# Altium PCB 3_Battery_Charger_PCB.PcbDoc
Units mil, origin at the board's own origin, x right, y up, seen from the top; angles counter-clockwise.
Board outline 2655 x 3850 mil, 2 copper layers (Top Layer, Bottom Layer); 31 components, 22 nets, 122 pads, 11 vias.
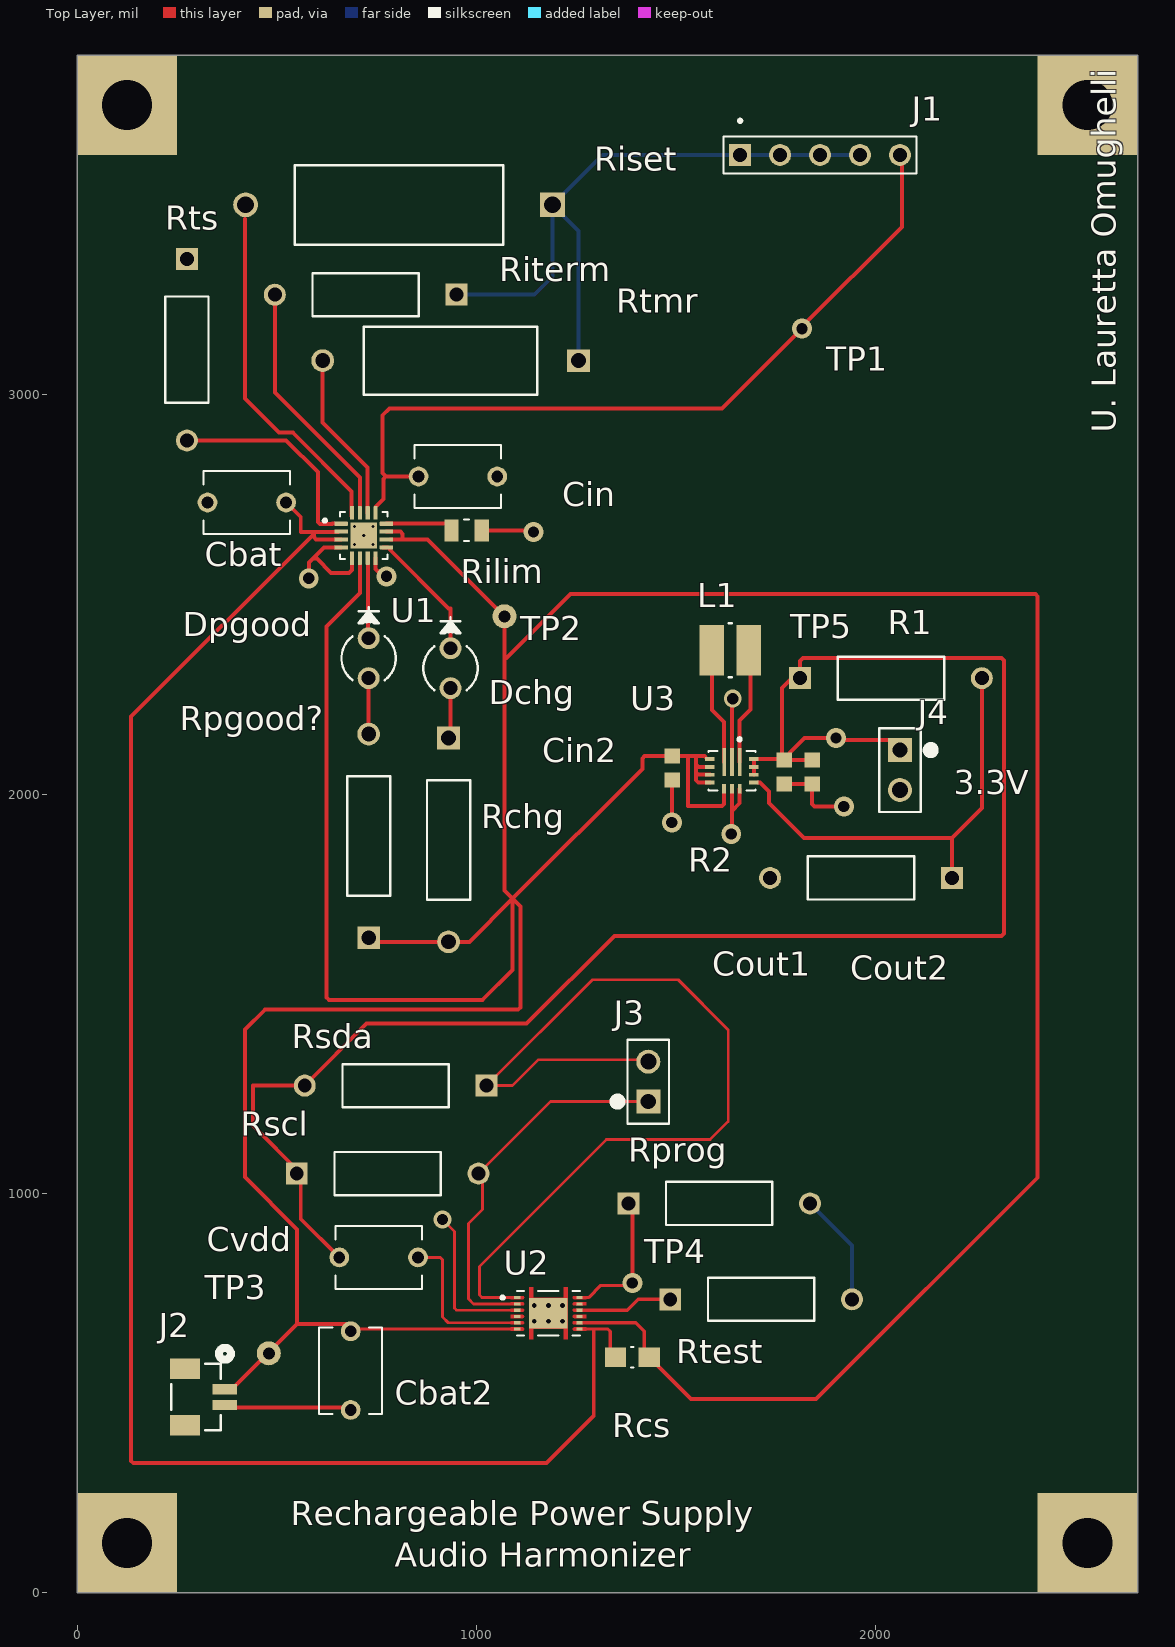
[diagram p0: Top Layer view]
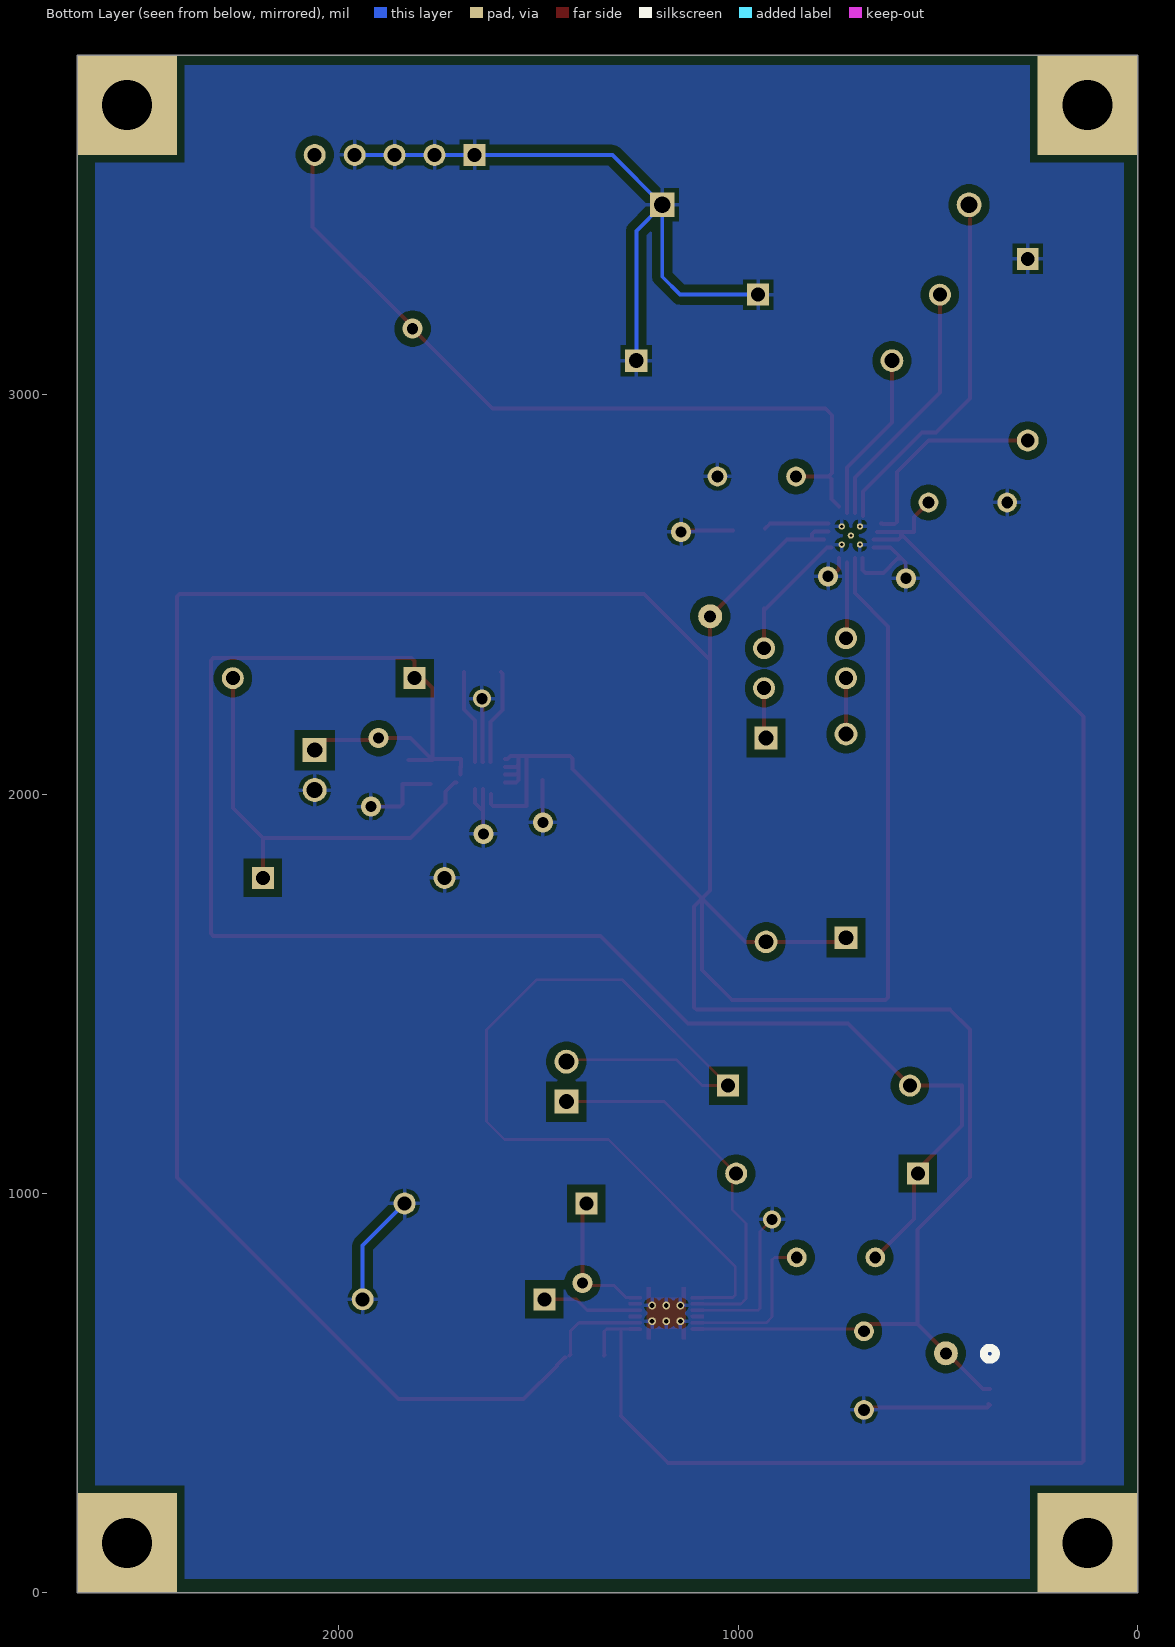
[diagram p1: Bottom Layer view, seen from below]
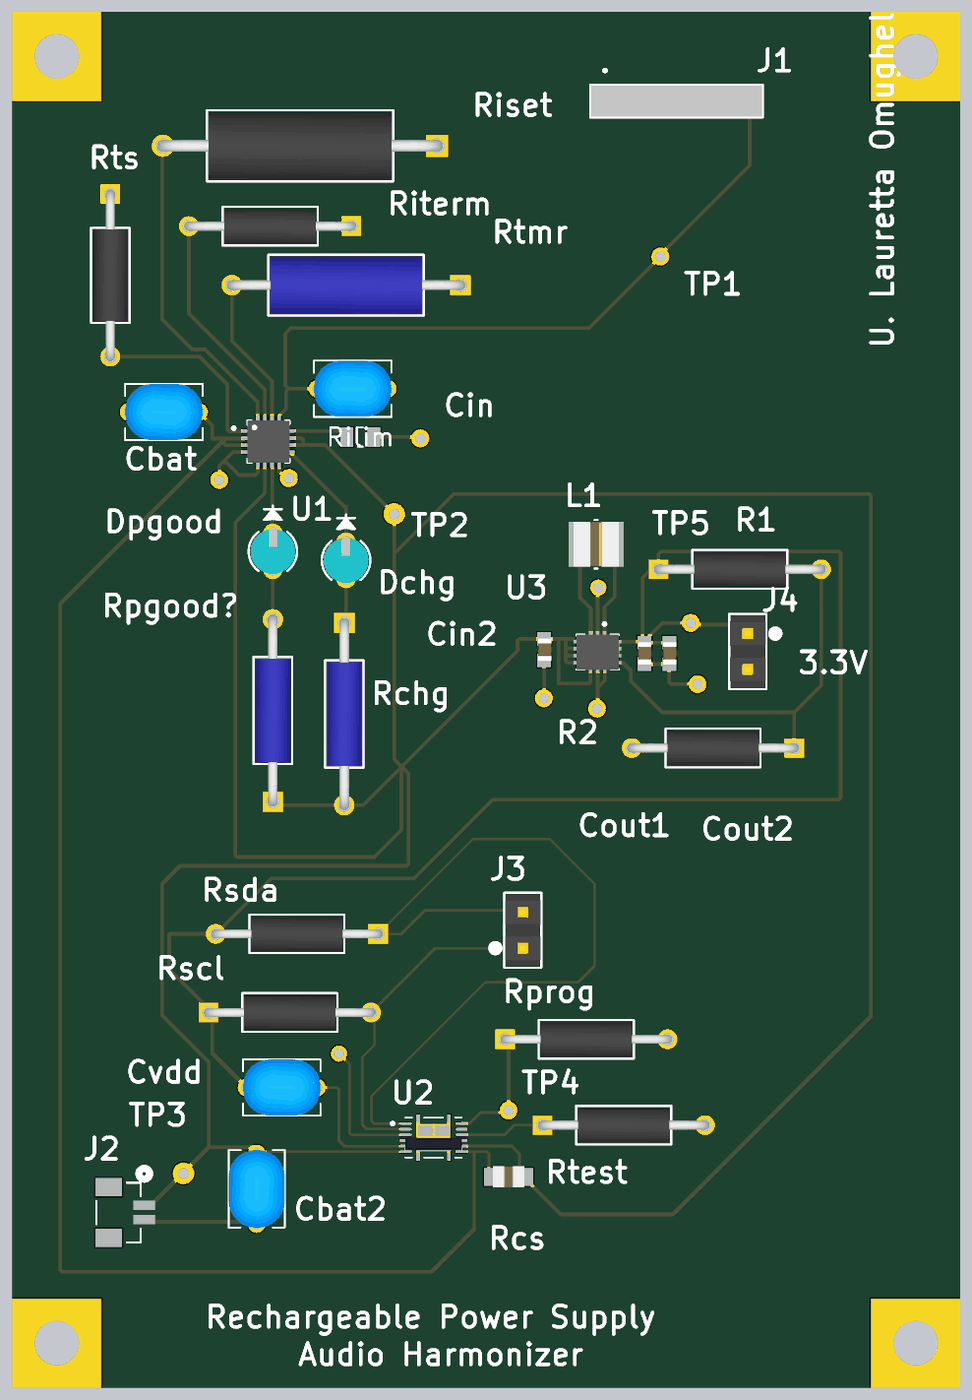
[diagram p2: 3D render of the assembled board from above, using the file's embedded part models]

## Layer stack, top to bottom
Top Solder: solder mask 0.4, Solder Resist, Dk 3.5
Top Layer: signal copper 1.4
Dielectric 1: dielectric 12.6, FR-4, Dk 4.8
Bottom Layer: signal copper 1.4
Bottom Solder: solder mask 0.4, Solder Resist, Dk 3.5

## Board outline
0,0 0,3850 2655,3850 2655,0

## Design rules (kind name [scope] priority, off if disabled: settings)
Clearance Clearance_POLY [InNamedPolygon('GND')] p1: gap=20 ignorepadtopadclearanceinfootprint=FALSE
Clearance [All] p2: gap=5 ignorepadtopadclearanceinfootprint=FALSE
HoleSize [All] p1: absolutevalues=TRUE maxlimit=150 minlimit=1 maxpercent=80.000 minpercent=20.000
PolygonConnect [All] p1: connectstyle=Relief reliefconductorwidth=10 reliefentries=4 polygonreliefangle="90 Angle" airgapwidth=10
RoutingVias [All] p1: holewidth=28 width=50 viastyle="Through Hole" minholewidth=28 minwidth=50 maxholewidth=28 maxwidth=50
SolderMaskExpansion [All] p1: expansion=4 istentingtop=FALSE
Width [InNet('NetCin_2')] p1 off: maxlimit=20 minlimit=10 preferedwidth=15 minimp=50.000000 maximp=50.000000 favimp=50.000000
29 further rules are at their usual default settings.

## Components (designator, comment, footprint, x,y, rotation, side; value= is the part's Value field where it differs from the comment)
Cbat "4.7 uF" CAP_RCER71H475K3K1H03B 425,2730 r180 top
Cbat2 "1 uF" CAP_RCER71H475K3K1H03B 685,556.57 r270 top
Cin "4.7 uF" CAP_RCER71H475K3K1H03B 953.43,2795 r180 top
Cin2 "Cap" CAPC1608X95N 1490,2065 r270 top value=10uF
Cout1 "Cap" CAPC1608X95N 1770,2055 r270 top value=10uF
Cout2 "Cap" CAPC1608X95N 1840,2055 r270 top value="47 uF"
Cvdd "0.47 uF" CAP_RCER71H475K3K1H03B 755,840 r180 top
Dchg "WP710A10-VN42" LED_WP710A10_KNB 935,2365 r270 top
Dpgood "WP710A10-VN42" LED_WP710A10_KNB 730,2390 r270 top
J1 "87224-5" TE_87224-5 1860,3600 r0 top
J2 "BM02B-SRSS-TB (LF)(SN)" CONN_BM02B-SRSS-TB_JST 297.96,490.32 r270 top
J3 "77311-101-02LF" 77311-101-02LF_AMP 1430,1230 r270 top
J4 "77311-101-02LF" 77311-101-02LF_AMP 2060,2110 r90 top
L1 "1 uH" IND_340068_WRE 1635,2360 r180 top
R1 "Rchg" RES_VISHAY_HVR25_VIS 1810,2290 r0 top value="560 kR"
R2 "Rchg" RES_VISHAY_HVR25_VIS 2190,1790 r180 top value="180 kR"
Rchg "Rchg" RES_CMF07_VIS 930,2140 r270 top value=490R
Rcs "RJ2J3" RES_ERJ6CWFR010V 1390,590 r180 top value="0.010 R"
Rilim "3.06 kR" RESC2012X60N 975,2660 r0 top
Riset "Riset" AC03_VIS 1190,3475 r180 top value="4.35 kR"
Riterm "Riterm" RES_VISHAY_HVR25_VIS 950,3250 r180 top value="3.57 kR"
Rpgood? "Rpgood" RES_CMF07_VIS 730,1640 r90 top value=490R
Rprog "Rprog" RES_VISHAY_HVR25_VIS 1380,975 r0 top value="1.0M R"
Rscl "Rchg" RES_VISHAY_HVR25_VIS 550,1050 r0 top value="5.1 kR"
Rsda "Rchg" RES_VISHAY_HVR25_VIS 1025,1270 r180 top value="5.1 kR"
Rtest "Rtest" RES_VISHAY_HVR25_VIS 1485,735 r0 top value="1.0M R"
Rtmr "Riset" RES_CMF60_VIS 1255,3085 r180 top value="56.2 kR"
Rts "Rchg" RES_VISHAY_HVR25_VIS 275,3340 r270 top value="10 kR"
U1 "BQ24232HRGTR" QFN50P300X300X100-17N 717.83,2647.17 r0 top
U2 "BQ27411DRZT-G1C" IC_BQ27441DRZR-G1A 1180,700 r0 top
U3 "TPS630250RNCT" VREG_TPS630250RNCT 1639.29,2058.19 r270 top

## Footprints (in the part's own frame and the unit in brackets; to place one, negate y for a bottom-side part, rotate by r counter-clockwise, add the part's x,y. Pads: shape width x height; smd on the part's side, far side on the other; paste and mask are expansions set on the pad)
77311-101-02LF_AMP [mil]
  rect 60x60 hole 38 mask+0: 1(0,0)
  round 60 hole 40 mask+0: 2(-100,0)
  silkscreen extent -155,-87 55,52, body extent -150,-50 50,50, height 350
AC03_VIS [mil]
  rect 62x62 hole 42 mask+0: 1(0,0)
  round 62 hole 42 mask+0: 2(768,0)
  silkscreen extent 123,-99 645,100, body extent -16,-94 784,95, height 189
CAP_RCER71H475K3K1H03B [mm]
  round 1.258 hole 0.75: 1(-2.5,0) 2(2.5,0)
  silkscreen extent -2.75,-2 2.75,2, body extent -2.75,-2 2.75,2, height 7.5
CAPC1608X95N [mm]
  rect 0.95x0.98 smd: 1(-0.763,0) 2(0.763,0)
  body extent -0.8,-0.44 0.8,0.51, height 0.4
CONN_BM02B-SRSS-TB_JST [mil]
  rect 26x61 smd paste+0 mask+0: 1(-19.68,72.04) 2(19.68,72.04)
  rect 51x75 smd: 3(-70.87,-27.37) 4(70.87,-27.37)
  silkscreen extent -123,-62 84,87, body extent 0,0 10,10, height 10
IC_BQ27441DRZR-G1A [mm]
  rect 0.4x0.2 smd paste-1 mask+0: 1(-1.975,1) 2(-1.975,0.6) 3(-1.975,0.2) 4(-1.975,-0.2) 5(-1.975,-0.6) 6(-1.975,-1) 7(1.975,-1) 8(1.975,-0.6) 9(1.975,-0.2) 10(1.975,0.2) 11(1.975,0.6) 12(1.975,1)
  rect 2.45x1.95 smd paste-2 mask+0: 13(0,0)
  round 0.5 hole 0.3: 14(-0.9,0.5) 15(0,0.5) 16(0.9,0.5) 17(-0.9,-0.5) 18(0,-0.5) 19(0.9,-0.5)
  Top Layer region: 2.4,0.9 1.65,0.9 1.645,0.9 1.64,0.901 1.634,0.901 1.629,0.902 1.624,0.903 1.619,0.905 1.614,0.907 1.609,0.909 1.605,0.911 1.6,0.913 1.596,0.916 1.591,0.919 1.587,0.922 1.583,0.926 1.579,0.929 1.576,0.933 1.572,0.937 1.569,0.941 1.566,0.946 1.563,0.95 1.561,0.955 1.559,0.959 1.557,0.964 1.555,0.969 1.553,0.974 1.552,0.979 1.551,0.984 1.551,0.99 1.55,0.995 1.55,1 1.55,1.005 1.551,1.01 1.551,1.016 1.552,1.021 1.553,1.026 1.555,1.031 1.557,1.036 1.559,1.041 1.561,1.045 1.563,1.05 1.566,1.054 1.569,1.059 1.572,1.063 1.576,1.067 1.579,1.071 1.583,1.074 1.587,1.078 1.591,1.081 1.596,1.084 1.6,1.087 1.605,1.089 1.609,1.091 1.614,1.093 1.619,1.095 1.624,1.097 1.629,1.098 1.634,1.099 1.64,1.099 1.645,1.1 1.65,1.1 2.4,1.1
  Top Layer region: 2.4,0.5 1.65,0.5 1.645,0.5 1.64,0.501 1.634,0.501 1.629,0.502 1.624,0.503 1.619,0.505 1.614,0.507 1.609,0.509 1.605,0.511 1.6,0.513 1.596,0.516 1.591,0.519 1.587,0.522 1.583,0.526 1.579,0.529 1.576,0.533 1.572,0.537 1.569,0.541 1.566,0.546 1.563,0.55 1.561,0.555 1.559,0.559 1.557,0.564 1.555,0.569 1.553,0.574 1.552,0.579 1.551,0.584 1.551,0.59 1.55,0.595 1.55,0.6 1.55,0.605 1.551,0.61 1.551,0.616 1.552,0.621 1.553,0.626 1.555,0.631 1.557,0.636 1.559,0.641 1.561,0.645 1.563,0.65 1.566,0.654 1.569,0.659 1.572,0.663 1.576,0.667 1.579,0.671 1.583,0.674 1.587,0.678 1.591,0.681 1.596,0.684 1.6,0.687 1.605,0.689 1.609,0.691 1.614,0.693 1.619,0.695 1.624,0.697 1.629,0.698 1.634,0.699 1.64,0.699 1.645,0.7 1.65,0.7 2.4,0.7
  Top Layer region: 2.4,0.1 1.65,0.1 1.645,0.1 1.64,0.101 1.634,0.101 1.629,0.102 1.624,0.103 1.619,0.105 1.614,0.107 1.609,0.109 1.605,0.111 1.6,0.113 1.596,0.116 1.591,0.119 1.587,0.122 1.583,0.126 1.579,0.129 1.576,0.133 1.572,0.137 1.569,0.141 1.566,0.146 1.563,0.15 1.561,0.155 1.559,0.159 1.557,0.164 1.555,0.169 1.553,0.174 1.552,0.179 1.551,0.184 1.551,0.19 1.55,0.195 1.55,0.2 1.55,0.205 1.551,0.21 1.551,0.216 1.552,0.221 1.553,0.226 1.555,0.231 1.557,0.236 1.559,0.241 1.561,0.245 1.563,0.25 1.566,0.254 1.569,0.259 1.572,0.263 1.576,0.267 1.579,0.271 1.583,0.274 1.587,0.278 1.591,0.281 1.596,0.284 1.6,0.287 1.605,0.289 1.609,0.291 1.614,0.293 1.619,0.295 1.624,0.297 1.629,0.298 1.634,0.299 1.64,0.299 1.645,0.3 1.65,0.3 2.4,0.3
  Top Layer region: 2.4,-0.3 1.65,-0.3 1.645,-0.3 1.64,-0.299 1.634,-0.299 1.629,-0.298 1.624,-0.297 1.619,-0.295 1.614,-0.293 1.609,-0.291 1.605,-0.289 1.6,-0.287 1.596,-0.284 1.591,-0.281 1.587,-0.278 1.583,-0.274 1.579,-0.271 1.576,-0.267 1.572,-0.263 1.569,-0.259 1.566,-0.254 1.563,-0.25 1.561,-0.245 1.559,-0.241 1.557,-0.236 1.555,-0.231 1.553,-0.226 1.552,-0.221 1.551,-0.216 1.551,-0.21 1.55,-0.205 1.55,-0.2 1.55,-0.195 1.551,-0.19 1.551,-0.184 1.552,-0.179 1.553,-0.174 1.555,-0.169 1.557,-0.164 1.559,-0.159 1.561,-0.155 1.563,-0.15 1.566,-0.146 1.569,-0.141 1.572,-0.137 1.576,-0.133 1.579,-0.129 1.583,-0.126 1.587,-0.122 1.591,-0.119 1.596,-0.116 1.6,-0.113 1.605,-0.111 1.609,-0.109 1.614,-0.107 1.619,-0.105 1.624,-0.103 1.629,-0.102 1.634,-0.101 1.64,-0.101 1.645,-0.1 1.65,-0.1 2.4,-0.1
  Top Layer region: 2.4,-0.7 1.65,-0.7 1.645,-0.7 1.64,-0.699 1.634,-0.699 1.629,-0.698 1.624,-0.697 1.619,-0.695 1.614,-0.693 1.609,-0.691 1.605,-0.689 1.6,-0.687 1.596,-0.684 1.591,-0.681 1.587,-0.678 1.583,-0.674 1.579,-0.671 1.576,-0.667 1.572,-0.663 1.569,-0.659 1.566,-0.654 1.563,-0.65 1.561,-0.645 1.559,-0.641 1.557,-0.636 1.555,-0.631 1.553,-0.626 1.552,-0.621 1.551,-0.616 1.551,-0.61 1.55,-0.605 1.55,-0.6 1.55,-0.595 1.551,-0.59 1.551,-0.584 1.552,-0.579 1.553,-0.574 1.555,-0.569 1.557,-0.564 1.559,-0.559 1.561,-0.555 1.563,-0.55 1.566,-0.546 1.569,-0.541 1.572,-0.537 1.576,-0.533 1.579,-0.529 1.583,-0.526 1.587,-0.522 1.591,-0.519 1.596,-0.516 1.6,-0.513 1.605,-0.511 1.609,-0.509 1.614,-0.507 1.619,-0.505 1.624,-0.503 1.629,-0.502 1.634,-0.501 1.64,-0.501 1.645,-0.5 1.65,-0.5 2.4,-0.5
  Top Layer region: 2.4,-1.1 1.65,-1.1 1.645,-1.1 1.64,-1.099 1.634,-1.099 1.629,-1.098 1.624,-1.097 1.619,-1.095 1.614,-1.093 1.609,-1.091 1.605,-1.089 1.6,-1.087 1.596,-1.084 1.591,-1.081 1.587,-1.078 1.583,-1.074 1.579,-1.071 1.576,-1.067 1.572,-1.063 1.569,-1.059 1.566,-1.054 1.563,-1.05 1.561,-1.045 1.559,-1.041 1.557,-1.036 1.555,-1.031 1.553,-1.026 1.552,-1.021 1.551,-1.016 1.551,-1.01 1.55,-1.005 1.55,-1 1.55,-0.995 1.551,-0.99 1.551,-0.984 1.552,-0.979 1.553,-0.974 1.555,-0.969 1.557,-0.964 1.559,-0.959 1.561,-0.955 1.563,-0.95 1.566,-0.946 1.569,-0.941 1.572,-0.937 1.576,-0.933 1.579,-0.929 1.583,-0.926 1.587,-0.922 1.591,-0.919 1.596,-0.916 1.6,-0.913 1.605,-0.911 1.609,-0.909 1.614,-0.907 1.619,-0.905 1.624,-0.903 1.629,-0.902 1.634,-0.901 1.64,-0.901 1.645,-0.9 1.65,-0.9 2.4,-0.9
  Top Layer region: -1.645,-0.9 -1.64,-0.901 -1.634,-0.901 -1.629,-0.902 -1.624,-0.903 -1.619,-0.905 -1.614,-0.907 -1.609,-0.909 -1.605,-0.911 -1.6,-0.913 -1.596,-0.916 -1.591,-0.919 -1.587,-0.922 -1.583,-0.926 -1.579,-0.929 -1.576,-0.933 -1.572,-0.937 -1.569,-0.941 -1.566,-0.946 -1.563,-0.95 -1.561,-0.955 -1.559,-0.959 -1.557,-0.964 -1.555,-0.969 -1.553,-0.974 -1.552,-0.979 -1.551,-0.984 -1.551,-0.99 -1.55,-0.995 -1.55,-1 -1.55,-1.005 -1.551,-1.01 -1.551,-1.016 -1.552,-1.021 -1.553,-1.026 -1.555,-1.031 -1.557,-1.036 -1.559,-1.041 -1.561,-1.045 -1.563,-1.05 -1.566,-1.054 -1.569,-1.059 -1.572,-1.063 -1.576,-1.067 -1.579,-1.071 -1.583,-1.074 -1.587,-1.078 -1.591,-1.081 -1.596,-1.084 -1.6,-1.087 -1.605,-1.089 -1.609,-1.091 -1.614,-1.093 -1.619,-1.095 -1.624,-1.097 -1.629,-1.098 -1.634,-1.099 -1.64,-1.099 -1.645,-1.1 -1.65,-1.1 -2.4,-1.1 -2.4,-0.9 -1.65,-0.9
  Top Layer region: -1.645,-0.5 -1.64,-0.501 -1.634,-0.501 -1.629,-0.502 -1.624,-0.503 -1.619,-0.505 -1.614,-0.507 -1.609,-0.509 -1.605,-0.511 -1.6,-0.513 -1.596,-0.516 -1.591,-0.519 -1.587,-0.522 -1.583,-0.526 -1.579,-0.529 -1.576,-0.533 -1.572,-0.537 -1.569,-0.541 -1.566,-0.546 -1.563,-0.55 -1.561,-0.555 -1.559,-0.559 -1.557,-0.564 -1.555,-0.569 -1.553,-0.574 -1.552,-0.579 -1.551,-0.584 -1.551,-0.59 -1.55,-0.595 -1.55,-0.6 -1.55,-0.605 -1.551,-0.61 -1.551,-0.616 -1.552,-0.621 -1.553,-0.626 -1.555,-0.631 -1.557,-0.636 -1.559,-0.641 -1.561,-0.645 -1.563,-0.65 -1.566,-0.654 -1.569,-0.659 -1.572,-0.663 -1.576,-0.667 -1.579,-0.671 -1.583,-0.674 -1.587,-0.678 -1.591,-0.681 -1.596,-0.684 -1.6,-0.687 -1.605,-0.689 -1.609,-0.691 -1.614,-0.693 -1.619,-0.695 -1.624,-0.697 -1.629,-0.698 -1.634,-0.699 -1.64,-0.699 -1.645,-0.7 -1.65,-0.7 -2.4,-0.7 -2.4,-0.5 -1.65,-0.5
  Top Layer region: -1.645,-0.1 -1.64,-0.101 -1.634,-0.101 -1.629,-0.102 -1.624,-0.103 -1.619,-0.105 -1.614,-0.107 -1.609,-0.109 -1.605,-0.111 -1.6,-0.113 -1.596,-0.116 -1.591,-0.119 -1.587,-0.122 -1.583,-0.126 -1.579,-0.129 -1.576,-0.133 -1.572,-0.137 -1.569,-0.141 -1.566,-0.146 -1.563,-0.15 -1.561,-0.155 -1.559,-0.159 -1.557,-0.164 -1.555,-0.169 -1.553,-0.174 -1.552,-0.179 -1.551,-0.184 -1.551,-0.19 -1.55,-0.195 -1.55,-0.2 -1.55,-0.205 -1.551,-0.21 -1.551,-0.216 -1.552,-0.221 -1.553,-0.226 -1.555,-0.231 -1.557,-0.236 -1.559,-0.241 -1.561,-0.245 -1.563,-0.25 -1.566,-0.254 -1.569,-0.259 -1.572,-0.263 -1.576,-0.267 -1.579,-0.271 -1.583,-0.274 -1.587,-0.278 -1.591,-0.281 -1.596,-0.284 -1.6,-0.287 -1.605,-0.289 -1.609,-0.291 -1.614,-0.293 -1.619,-0.295 -1.624,-0.297 -1.629,-0.298 -1.634,-0.299 -1.64,-0.299 -1.645,-0.3 -1.65,-0.3 -2.4,-0.3 -2.4,-0.1 -1.65,-0.1
  Top Layer region: -1.645,0.3 -1.64,0.299 -1.634,0.299 -1.629,0.298 -1.624,0.297 -1.619,0.295 -1.614,0.293 -1.609,0.291 -1.605,0.289 -1.6,0.287 -1.596,0.284 -1.591,0.281 -1.587,0.278 -1.583,0.274 -1.579,0.271 -1.576,0.267 -1.572,0.263 -1.569,0.259 -1.566,0.254 -1.563,0.25 -1.561,0.245 -1.559,0.241 -1.557,0.236 -1.555,0.231 -1.553,0.226 -1.552,0.221 -1.551,0.216 -1.551,0.21 -1.55,0.205 -1.55,0.2 -1.55,0.195 -1.551,0.19 -1.551,0.184 -1.552,0.179 -1.553,0.174 -1.555,0.169 -1.557,0.164 -1.559,0.159 -1.561,0.155 -1.563,0.15 -1.566,0.146 -1.569,0.141 -1.572,0.137 -1.576,0.133 -1.579,0.129 -1.583,0.126 -1.587,0.122 -1.591,0.119 -1.596,0.116 -1.6,0.113 -1.605,0.111 -1.609,0.109 -1.614,0.107 -1.619,0.105 -1.624,0.103 -1.629,0.102 -1.634,0.101 -1.64,0.101 -1.645,0.1 -1.65,0.1 -2.4,0.1 -2.4,0.3 -1.65,0.3
  Top Layer region: -1.645,0.7 -1.64,0.699 -1.634,0.699 -1.629,0.698 -1.624,0.697 -1.619,0.695 -1.614,0.693 -1.609,0.691 -1.605,0.689 -1.6,0.687 -1.596,0.684 -1.591,0.681 -1.587,0.678 -1.583,0.674 -1.579,0.671 -1.576,0.667 -1.572,0.663 -1.569,0.659 -1.566,0.654 -1.563,0.65 -1.561,0.645 -1.559,0.641 -1.557,0.636 -1.555,0.631 -1.553,0.626 -1.552,0.621 -1.551,0.616 -1.551,0.61 -1.55,0.605 -1.55,0.6 -1.55,0.595 -1.551,0.59 -1.551,0.584 -1.552,0.579 -1.553,0.574 -1.555,0.569 -1.557,0.564 -1.559,0.559 -1.561,0.555 -1.563,0.55 -1.566,0.546 -1.569,0.541 -1.572,0.537 -1.576,0.533 -1.579,0.529 -1.583,0.526 -1.587,0.522 -1.591,0.519 -1.596,0.516 -1.6,0.513 -1.605,0.511 -1.609,0.509 -1.614,0.507 -1.619,0.505 -1.624,0.503 -1.629,0.502 -1.634,0.501 -1.64,0.501 -1.645,0.5 -1.65,0.5 -2.4,0.5 -2.4,0.7 -1.65,0.7
  Top Layer region: -1.645,1.1 -1.64,1.099 -1.634,1.099 -1.629,1.098 -1.624,1.097 -1.619,1.095 -1.614,1.093 -1.609,1.091 -1.605,1.089 -1.6,1.087 -1.596,1.084 -1.591,1.081 -1.587,1.078 -1.583,1.074 -1.579,1.071 -1.576,1.067 -1.572,1.063 -1.569,1.059 -1.566,1.054 -1.563,1.05 -1.561,1.045 -1.559,1.041 -1.557,1.036 -1.555,1.031 -1.553,1.026 -1.552,1.021 -1.551,1.016 -1.551,1.01 -1.55,1.005 -1.55,1 -1.55,0.995 -1.551,0.99 -1.551,0.984 -1.552,0.979 -1.553,0.974 -1.555,0.969 -1.557,0.964 -1.559,0.959 -1.561,0.955 -1.563,0.95 -1.566,0.946 -1.569,0.941 -1.572,0.937 -1.576,0.933 -1.579,0.929 -1.583,0.926 -1.587,0.922 -1.591,0.919 -1.596,0.916 -1.6,0.913 -1.605,0.911 -1.609,0.909 -1.614,0.907 -1.619,0.905 -1.624,0.903 -1.629,0.902 -1.634,0.901 -1.64,0.901 -1.645,0.9 -1.65,0.9 -2.4,0.9 -2.4,1.1 -1.65,1.1
  Top Layer region: 1.225,-1.65 0.975,-1.65 0.975,-0.975 -0.975,-0.975 -0.975,-1.65 -1.225,-1.65 -1.225,1.65 -0.975,1.65 -0.975,0.975 0.975,0.975 0.975,1.65 1.225,1.65
  silkscreen extent -3.01,-1.42 2,1.42, body extent -2.05,-0.95 2.05,0, height 1.25
IND_340068_WRE [mil]
  rect 61x126 smd paste+0 mask+0: 1(-46.5,0) 2(46.5,0)
  silkscreen extent -4,-68 4,68, body extent -63,-63 63,63, height 47
LED_WP710A10_KNB [mil]
  round 55 hole 35 mask+0: 1(0,0) 2(100,0)
  silkscreen extent -78,-68 105,68, body extent -13,-63 113,63, height 182
QFN50P300X300X100-17N [mm]
  rrect25% 0.86x0.26 smd: 1(-1.435,0.75) 2(-1.435,0.25) 3(-1.435,-0.25) 4(-1.435,-0.75) 9(1.435,-0.75) 10(1.435,-0.25) 11(1.435,0.25) 12(1.435,0.75)
  rrect25% 0.26x0.86 smd: 5(-0.75,-1.435) 6(-0.25,-1.435) 7(0.25,-1.435) 8(0.75,-1.435) 13(0.75,1.435) 14(0.25,1.435) 15(-0.25,1.435) 16(-0.75,1.435)
  rect 1.68x1.68 smd paste-2: 17(0,0)
  round 0.4 hole 0.2 mask+0: 18(0,0) 19(-0.58,0.58) 20(0.58,0.58) 21(-0.58,-0.58) 22(0.58,-0.58)
  silkscreen extent -2.57,-1.5 1.5,1.5, body extent -1.5,-1.5 1.5,1.5, height 1
RES_CMF07_VIS [mil]
  rect 57x57 hole 37 mask+0: 1(0,0)
  round 57 hole 37 mask+0: 2(510,0)
  silkscreen extent 105,-54 405,54, body extent -14,-49 524,49, height 98
RES_CMF60_VIS [mil]
  rect 57x57 hole 37 mask+0: 1(0,0)
  round 57 hole 37 mask+0: 2(640,0)
  silkscreen extent 102,-85 538,85, body extent -14,-80 654,80, height 160
RES_ERJ6CWFR010V [mm]
  rect 1.35x1.25 smd: 1(-1.075,0) 2(1.075,0)
  silkscreen extent -0.08,-0.65 0.08,0.65, body extent -1.13,-0.75 1.13,0.75, height 0.76
RES_VISHAY_HVR25_VIS [mil]
  rect 55x55 hole 35 mask+0: 1(0,0)
  round 55 hole 35 mask+0: 2(455,0)
  silkscreen extent 94,-54 360,54, body extent -12,-49 467,49, height 98
RESC2012X60N [mm]
  rect 0.92x1.38 smd: 1(-0.955,0) 2(0.955,0)
  silkscreen extent -0.17,-0.68 0.17,0.68
TE_87224-5 [mil]
  rect 55x55 hole 35: 1(-200,0)
  round 55 hole 35: 2(-100,0) 3(0,0) 4(100,0) 5(200,0)
  silkscreen extent -242,-46 242,89, body extent -242,-46 242,46, height 318
VREG_TPS630250RNCT [mm]
  rect 1.79x0.22 smd paste-2 mask+0: 1(-0.555,0.49) 3(-0.555,-0.49)
  rect 1.79x0.24 smd paste-2 mask+0: 2(-0.555,0)
  rect 0.24x0.6 smd mask+0: 4(-0.75,-1.4) 5(-0.25,-1.4) 6(0.25,-1.4) 7(0.75,-1.4) 11(0.75,1.4) 12(0.25,1.4) 13(-0.25,1.4) 14(-0.75,1.4)
  rect 0.6x0.24 smd mask+0: 8(1.15,-0.5) 9(1.15,0) 10(1.15,0.5)
  silkscreen extent -2.1,-1.5 1.25,1.5, body extent -1.25,-1.5 1.25,1.5, height 0.95

## Part data
Cbat Cin: library part RCER71H475K3K1H03B, "Lead capacitor X7R(EIA) with Capacitance 4.7F, Rated Voltage 50Vdc", Package=NONSTANDARD, Check_prices=https://www.snapeda.com/parts/RCER71H475K3K1H03B/Murata/view-part/?ref=eda, Digi-Key_Part_Number=490-11893-ND, MF=Murata, MP=RCER71H475K3K1H03B, Purchase-URL=https://pricing.snapeda.com/search/part/RCER71H475K3K1H03B/?ref=eda, SnapEDA_Link=https://www.snapeda.com/parts/RCER71H475K3K1H03B/Murata/view-part/?ref=snap
Cbat2 Cvdd: library part RCER71H475K3K1H03B, "K105K20X7RF5TH5", Package=NONSTANDARD, Check_prices=https://www.snapeda.com/parts/RCER71H475K3K1H03B/Murata/view-part/?ref=eda, Digi-Key_Part_Number=490-11893-ND, MF=Murata, MP=RCER71H475K3K1H03B, Purchase-URL=https://pricing.snapeda.com/search/part/RCER71H475K3K1H03B/?ref=eda, SnapEDA_Link=https://www.snapeda.com/parts/RCER71H475K3K1H03B/Murata/view-part/?ref=snap
Cin2 Cout1 Cout2: "Capacitor", LatestRevisionDate=17-Jul-2002, LatestRevisionNote="Re-released for DXP Platform.", PackageDescription="Radial Cap, Thru-Hole; 2 Leads; 0.3 in Pin Spacing", PackageReference=RAD-0.3, Published=8-Jun-2000, Publisher="Altium Limited"
Dchg Dpgood: "No Description Available", Mfr_Name=Kingbright, Copyright="Copyright (C) 2022 Ultra Librarian. All rights reserved.", Manufacturer_Part_Number=WP710A10-VN42, RefDes=RefDes, Type=DEV
J1: "Conn Unshrouded Header HDR 5 POS 2.54mm Solder ST Thru-Hole", Package=None, Availability=Good, Centerline_Pitch="2.54 mm[.1 in]", Check_prices=https://www.snapeda.com/parts/87224-5/TE%20Connectivity%20AMP%20Connectors/view-part/1233389/?ref=eda, EU_RoHS_Compliance=Compliant, MF="TE Connectivity", MP=87224-5, Number_of_Positions=5, Price=None, Product_Type=Connector, Purchase-URL=https://pricing.snapeda.com/search/part/87224-5/?ref=eda, SnapEDA_Link=https://www.snapeda.com/parts/87224-5/TE%20Connectivity%20AMP%20Connectors/view-part/1233389/?ref=snap
J2: "No Description Available", Mfr_Name=JST, Copyright="Copyright (C) 2022 Ultra Librarian. All rights reserved.", Digi-Key_Part_Number_1=455-1788-2-ND, Digi-Key_Part_Number_2=455-1788-1-ND, Digi-Key_Part_Number_3=455-1788-6-ND, Manufacturer_Part_Number="BM02B-SRSS-TB (LF)(SN)", RefDes=RefDes, Type=DEV
J3 J4: "No Description Available", Mfr_Name="Amphenol ICC", Copyright="Copyright (C) 2022 Ultra Librarian. All rights reserved.", Digi-Key_Part_Number_1=609-5674-ND, Digi-Key_Part_Number_2=77311-101-02LF-ND, Manufacturer_Part_Number=77311-101-02LF, RefDes=RefDes, Type=DEV
L1: library part 744383340068, "744383340068", Mfr_Name="Wurth Electronics", Copyright="Copyright (C) 2022 Ultra Librarian. All rights reserved.", Digi-Key_Part_Number_1=732-4953-2-ND, Digi-Key_Part_Number_2=732-4953-1-ND, Digi-Key_Part_Number_3=732-4953-6-ND, Manufacturer_Part_Number=744383340068, RefDes=RefDes, Type=DEV
R1 R2 Rchg Rcs Riset Riterm Rpgood? Rprog Rscl Rsda Rtest Rtmr Rts: library part Res1, "Resistor", LatestRevisionDate=17-Jul-2002, LatestRevisionNote="Re-released for DXP Platform.", PackageDescription="Axial Device, Thru-Hole; 2 Leads; 0.3 in Pin Spacing", PackageReference=AXIAL-0.3, Published=8-Jun-2000, Publisher="Altium Limited"
Rilim: library part RT0805BRD073K05L, "RES SMD 3.05K OHM 0.1% 1/8W 0805 RT0805BRD073K05L", Package=None, Availability=Unavailable, MP=RT0805BRD073K05L, Price=None
U1 U2: "No Description Available", Mfr_Name="Texas Instruments", Copyright="Copyright (C) 2021 Ultra Librarian. All rights reserved.", RefDes=RefDes, Type=DEV
  U1: Digi-Key_Part_Number_1=296-39912-1-ND, Digi-Key_Part_Number_2=296-39912-2-ND, Digi-Key_Part_Number_3=296-39912-6-ND, Digi-Key_Part_Number_4=BQ24232HRGTR-ND, Manufacturer_Part_Number=BQ24232HRGTR
  U2: Digi-Key_Part_Number_1=296-37270-1-ND, Digi-Key_Part_Number_2=296-37270-2-ND, Digi-Key_Part_Number_3=296-37270-6-ND, Digi-Key_Part_Number_4=2156-BQ27411DRZT-G1C-ND, Manufacturer_Part_Number=BQ27411DRZT-G1C
U3: "Industrys Smallest 4A Switch Single-Inductor Buck-Boost Converter 14-VQFN-HR -40 to 85", Package="VQFN-HR-14 Texas Instruments", Availability=Warning, Check_prices=https://www.snapeda.com/parts/TPS630250RNCT/Texas%20Instruments/view-part/543444/?ref=eda, MF="Texas Instruments", MP=TPS630250RNCT, Price=None, Purchase-URL=https://pricing.snapeda.com/search/part/TPS630250RNCT/?ref=eda, SnapEDA_Link=https://www.snapeda.com/parts/TPS630250RNCT/Texas%20Instruments/view-part/543444/?ref=snap

## Free pads (board coordinates)
  round 60 hole 30: 5(480,600) 6(1070,2445)
  rect 250x250 hole 125: MH(125,125) MH(125,3725) MH(2530,125) MH(2530,3725)

## Via types
v1: diameter 50, hole 28, Top Layer to Bottom Layer, 9 vias
v2: diameter 45, hole 28, Top Layer to Bottom Layer, 2 vias

## Nets (pads, with @x,y where several pads share a name; then routed paths per layer and width w, separated by ;. In a path a pad name is that pad's centre, name@x,y a point inside that pad or via, vN(x,y) a via of type N, cw(c..) or ccw(c..) an arc to the next point about the centre after c; other vN are vias at no path point)
GND: Cbat2.2 Cbat.2 Cin2.2 Cin.1 Cout1.2 Cout2.2 J1.1 J1.2 J1.3 J1.4 J2.2 J4.2 R2.2 Rilim.2 Riset.1 Riterm.1 Rprog.2 Rtest.2 Rtmr.1 Rts.1 U1.4 U1.5 U1.8 U1.17 U1.18 U1.19 U1.20 U1.21 U1.22 U2.3 U2.13 U2.14 U2.15 U2.16 U2.17 U2.18 U2.19 U3.2 U3.9 U3.10 | length 3836.3
  Top Layer w7: v2(915,935) 945,905 945,712.87 950,707.87 U2.3
  Top Layer w10: J2.2@372.97,473.6 J2.2 376.24,464.39 678.76,464.39 Cbat2.2 ; v1@581.03,2540 581.03,2580 590.44,2589.41 ; U1.4 618.67,2617.64 590.44,2589.41 ; Cbat2.2@682.03,473.6 Cbat2.2@685,476.57 ; U1.5 688.31,2560.86 681.22,2553.78 636.22,2553.78 600.59,2589.41 590.44,2589.41 ; U1.8 747.36,2563.49 765.86,2545 v1(775,2545) ; Rilim.2 1139.28,2660 v1(1143,2656.28) ; U2.13@1172.13,707.87 U2.13 ; v1(1488.83,1928.95) 1490,1930.12 Cin2.2 ; v1(1637.75,1900.36) 1639.29,1901.9 1639.29,1957.41 ; U3.9 1639.29,1957.41 ; U3.2 1639.57,2080.32 1639.57,2236.75 v2(1641.46,2238.64) ; U3.10 1658.98,1977.09 1639.29,1957.41 ; Cout1.2 Cout2.2 1840,1975 1846.26,1968.74 v1(1919.41,1968.74)
  Bottom Layer w10: Cbat.2 Cbat.2@334.14,2737.56 ; Riterm.1 1145,3250 1190,3295 Riset.1 ; Cin.1@1051.85,2784.3 Cin.1 ; Rtmr.1 1255,3410 Riset.1 ; Rprog.2 1940,870 Rtest.2 ; J1.4 J1.3 J1.2 J1.1 1315,3600 Riset.1
  other v1: 580,2540
NetCbat2_1: Cbat2.1 Cin2.1 J2.1 pad.5 pad.6 Rchg.2 Rcs.1 Rpgood?.1 U1.6 U1.10 U1.11 U2.6 U2.8 U3.4 U3.5 U3.6 U3.7 U3.8 | length 11353.2
  Top Layer w7: Cbat2.1 690.63,660.63 U2.6
  Top Layer w8: U2.8 1398.62,676.38 1420,655 Rcs.1@1420,597.32
  Top Layer w10: J2.1 387.5,510 550.93,673.43 ; Cbat2.1@685,673.43 550.93,673.43 ; U1.6 707.99,2502.99 625,2420 625,1490.86 630.86,1485 1015,1485 1090,1560 1090,1738.06 ; Rpgood?.1 740,1630 Rchg.2 981.94,1630 1090,1738.06 ; U1.11 809.14,2657.01 815,2651.15 815,2637.76 ; U1.10@785,2637.76 815,2637.76 ; Rcs.1@1420,597.32 Rcs.1@1422.32,595 ; Rcs.1 1434.29,590 1453.9,570.39 1453.9,568.43 1537.32,485 1850,485 2405,1040 2405,2495 2399.14,2500.86 1235.86,2500.86 1075,2340 1070,2340 ; U3.7 1555.86,2028.66 1550,2034.52 1550,2054.2 ; U3.6 1555.86,2048.35 1550,2054.2 ; U3.5 1555.86,2068.03 1550,2073.89 ; U3.4 1577.64,2087.72 1570.32,2095.04 1550,2095.04 ; 1619.29,2000 1619.29,1975.15 1614.14,1970 1530,1970 1530,2095.04 ; 550.93,673.43 550.93,910.39 420,1041.32 420,1410 470,1460 1104.14,1460 1110,1465.86 1110,1718.06 1090,1738.06 ; 815,2637.76 877.24,2637.76 pad.6 1070,2340 ; 1070,2340 1070,1758.06 1090,1738.06 ; 1090,1738.06 1415,2063.06 1415,2089.18 1420.86,2095.04 Cin2.1 1530,2095.04 ; 1530,2095.04 1550,2095.04 ; 1550,2054.2 1550,2073.89 ; 1550,2073.89 1550,2095.04
NetCbat_1: Cbat.1 Rcs.2 U1.2 U1.3 U2.7 | length 4344.5
  Top Layer w8: U2.7 1293.45,660.63 ; 1293.45,443.45 1293.45,660.63 ; Rcs.2@1335,595.71 1335,654.77 1329.14,660.63 1293.45,660.63
  Top Layer w10: Cbat.1 560,2693.43 560,2655.67 596.89,2655.67 ; U1.2@652.68,2655.67 596.89,2655.67 ; U1.3 598.54,2637.32 592.69,2643.18 592.69,2651.47 ; 1293.45,443.45 1175,325 140.86,325 135,330.86 135,2193.78 592.69,2651.47 ; Rcs.2@1335,595.71 Rcs.2@1335.71,595 ; 592.69,2651.47 596.89,2655.67
NetCin_2: Cin.2 J1.5 U1.13 | length 1997.7
  Top Layer w10: U1.13@747.8,2720 766.72,2738.92 766.72,2789.14 772.57,2795 773.32,2795 ; Cin.2 773.32,2795 ; J1.5@2065,3595 2065,3420 1815,3170 v1(1815,3165) 1615,2965 781.72,2965 765,2948.28 765,2803.32 773.32,2795
NetCout1_1: Cout1.1 Cout2.1 Cvdd.2 J4.1 R1.1 Rscl.1 Rsda.2 U3.12 U3.13 U3.14 | length 4542
  Top Layer w10: Cvdd.2 560,936.57 560,1050 440,1170 440,1270 Rsda.2 725,1425 1125,1425 1345,1645 1410,1645 2314.14,1645 2320,1650.86 2320,2334.14 2314.14,2340 1817.5,2340 1810,2332.5 R1.1@1810,2310 ; U3.12@1695,2048.62 1695,2067.76 1694.72,2068.03 U3.13 U3.14 1762.32,2087.72 Cout1.1@1765,2085.04 ; R1.1 R1.1@1810,2310 ; Cout2.1@1825,2085.04 Cout1.1 Cout1.1@1765.59,2085.04 ; J4.1@2065,2125 2055,2135 1905,2135 v1(1900,2140) 1820.55,2140 Cout1.1@1765.59,2085.04 ; Cout1.1@1765,2085.04 1765,2265 R1.1@1810,2310 ; Cout1.1@1765,2085.04 Cout1.1@1765.59,2085.04
NetCvdd_1: Cvdd.1 U2.5 | length 398.5
  Top Layer w7: Cvdd.1 909.14,840 915,834.14 915,690.86 929.41,676.45 U2.5@1100.28,676.45
NetDchg_1: Dchg.1 U1.9 | length 332.1
  Top Layer w10: U1.9@765.91,2617.2 777.8,2617.2 930,2465 935,2465 Dchg.1
NetDchg_2: Dchg.2 Rchg.1 | length 127.1
  Top Layer w10: Rchg.1 935,2145 Dchg.2
NetDpgood_1: Dpgood.1 U1.7 | length 190.8
  Top Layer w10: U1.7@727.99,2580 727.99,2392.01 Dpgood.1
NetDpgood_2: Dpgood.2 Rpgood?.2 | length 140
  Top Layer w10: Rpgood?.2 Dpgood.2
NetJ3_1: J3.1 Rscl.2 U2.2 | length 955.2
  Top Layer w7: Rscl.2 1185,1230 J3.1 ; Rscl.2@1015,1050 1015,960 980,925 980,736.38 992.76,723.62 U2.2
NetJ3_2: J3.2 Rsda.1 U2.1 | length 2372.9
  Top Layer w7: U2.1 1013.36,739.37 1007.14,745.58 1007.14,817.14 1325,1135 1585,1135 1630,1180 1630,1410 1505,1535 1290,1535 Rsda.1 1090,1270 1155,1335 J3.2@1425,1335
  Top Layer w10: J3.2@1425,1335 J3.2
NetL1_1: L1.1 U3.1 | length 236.5
  Top Layer w10: U3.1 1658.58,2183.58 1686.5,2211.5 L1.1@1686.5,2305
NetL1_2: L1.2 U3.3 | length 238.8
  Top Layer w10: L1.2@1593.5,2305 1590,2301.5 1590,2210 1620,2180 U3.3
NetR1_2: R1.2 R2.1 U3.11 | length 1144.4
  Top Layer w10: U3.11@1705,2028.62 1710,2028.62 1732.5,2006.12 1732.5,1977.5 1820,1890 2190,1890 ; R1.2 2265,1965 2190,1890 ; R2.1@2182.93,1810 R2.1@2190,1810 ; R2.1@2182.93,1810 2182.93,1797.07 2182.93,1782.93 R2.1 R2.1@2190,1802.93 ; R2.1@2182.93,1810 R2.1@2190,1802.93 ; R2.1@2190,1802.93 R2.1@2190,1810 ; R2.1@2190,1810 2190,1890
NetRilim_1: Rilim.1 U1.12 | length 162.9
  Top Layer w10: U1.12 920.71,2676.69 Rilim.1@932.4,2665
NetRiset_2: Riset.2 U1.16 | length 875.8
  Top Layer w10: 420,3440 420,2990 505,2905 540,2905 687.08,2757.92 687.08,2696.03 U1.16@687.56,2695.55
NetRiterm_2: Riterm.2 U1.15 | length 634.6
  Top Layer w10: Riterm.2 495,3005 707.99,2792.01 U1.15
NetRprog_1: Rprog.1 U2.12 | length 370.6
  Top Layer w8: U2.12 1280.63,739.37 1311.26,770 v1@1384.14,770
  Top Layer w10: Rprog.1@1380,995 1390,985 v1(1390,775.86) v1@1384.14,770
NetRtest_1: Rtest.1 U2.10 | length 221.7
  Top Layer w8: 1274.49,707.87 1377.87,707.87 1405,735 Rtest.1
NetRtmr_2: Rtmr.2 U1.14 | length 428
  Top Layer w10: Rtmr.2 615,2930 727.68,2817.32 U1.14
NetRts_2: Rts.2 U1.1 | length 527.7
  Top Layer w10: Rts.2 523.35,2885 602.68,2805.67 602.68,2681.53 608.54,2675.67 637.68,2675.67 639.13,2677.13 642.68,2677.13
pads on no net: J2.3 J2.4 U2.4 U2.9 U2.11

## Polygon pours and split planes (outlines as drawn)
GND on Bottom Layer "GND" (solid, pour order 0): 35,3045 35,3825 2610,3825 2610,35 35,35

## Silkscreen, mask and mechanical layers (free items; w line width, h text height)
Top Overlay:
  text "TP1" at 1875,3060 h60
  text "U. Lauretta Omughelli" at 2600,2905 h60 r90
  text "TP5" at 1785,2390 h60
  text "TP2" at 1110,2385 h60
  text "3.3V" at 2195,2000 h60
  text "TP4" at 1420,825 h60
  text "TP3" at 320,735 h60
  text "Rechargeable Power Supply" at 535,169.99 h60
  text "Audio Harmonizer" at 795,65 h60
Outline:
  the board outline again, w10